# Altium PCB driver_V1.1.PcbDoc
Units mm, origin at the board's own origin, x right, y up, seen from the top; angles counter-clockwise.
Board outline 63.2 x 30.2 mm, 2 copper layers (Top Layer, Bottom Layer), stack 1.58 mm thick; 35 components, 21 nets, 95 pads, 17 vias.
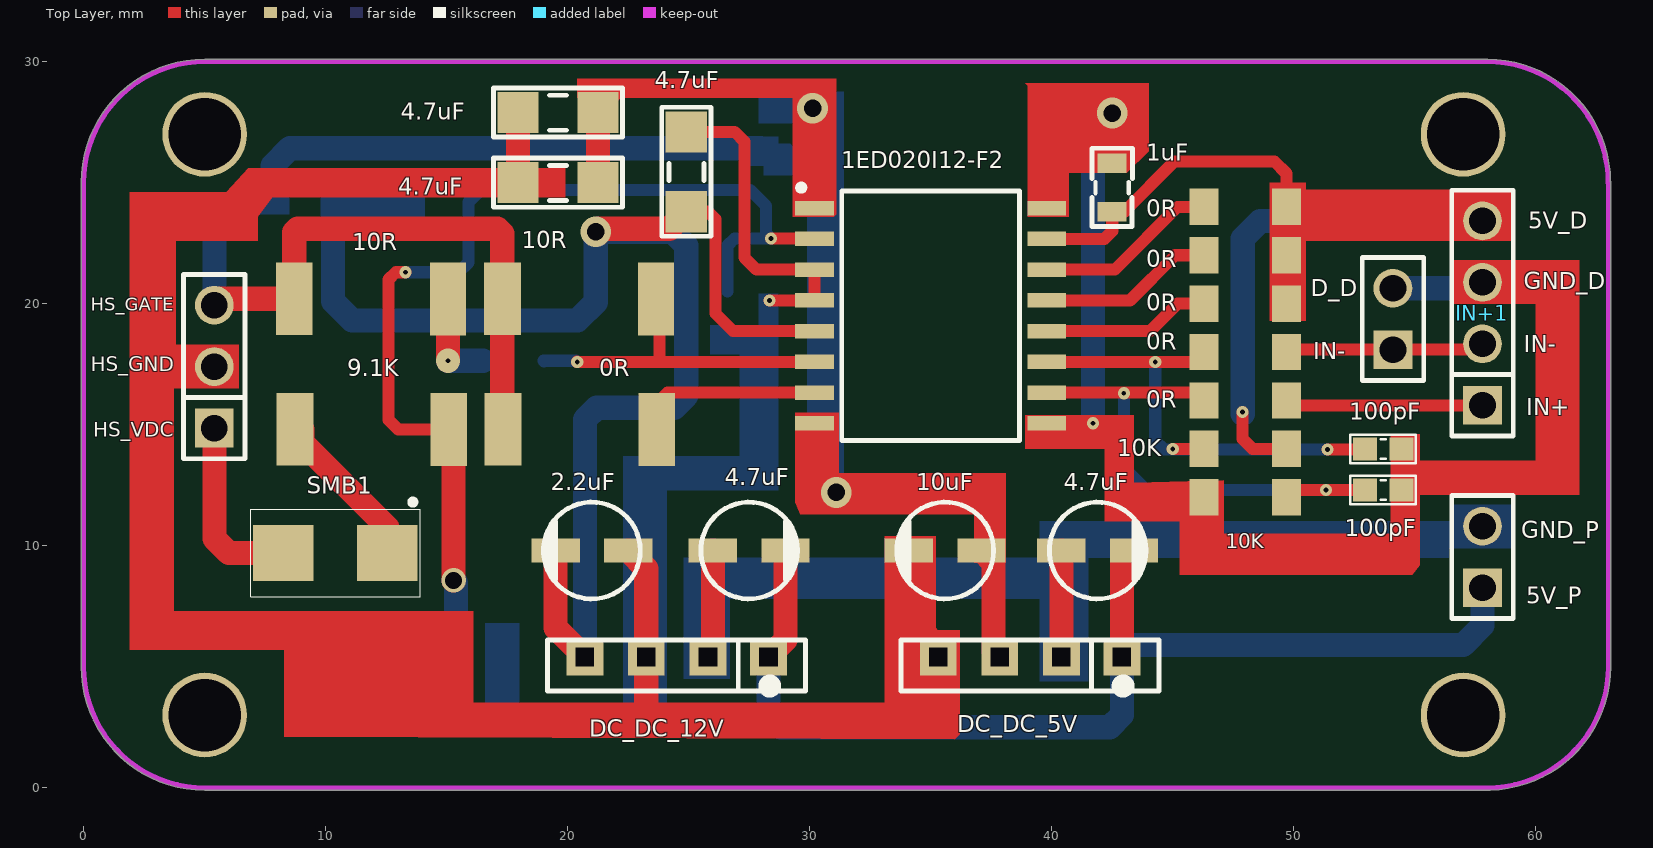
[diagram p0: Top Layer view]
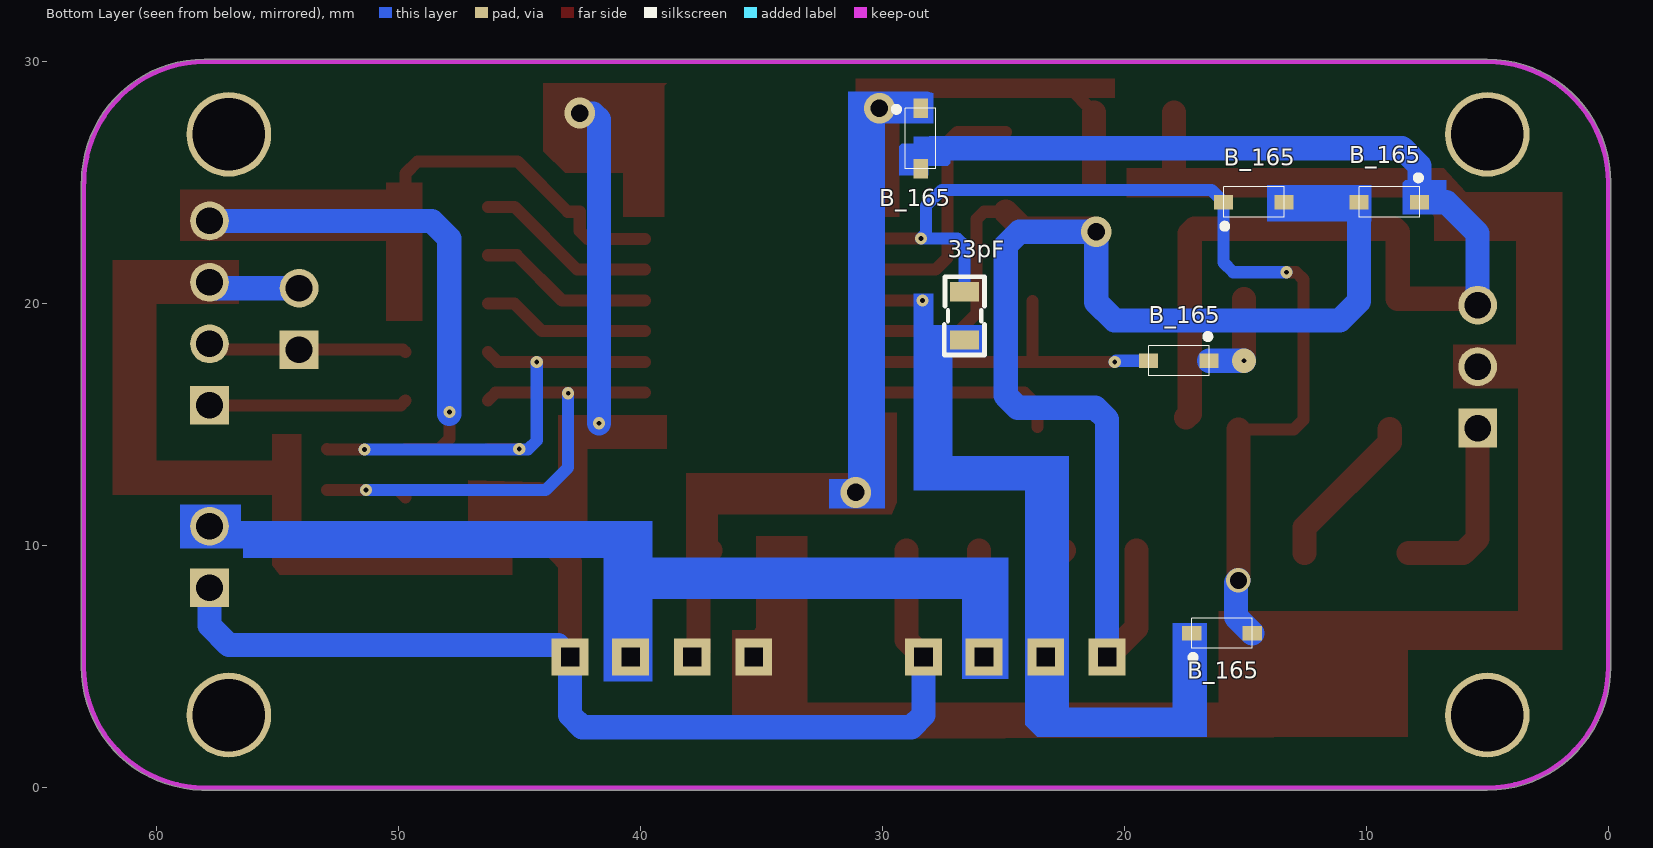
[diagram p1: Bottom Layer view, seen from below]
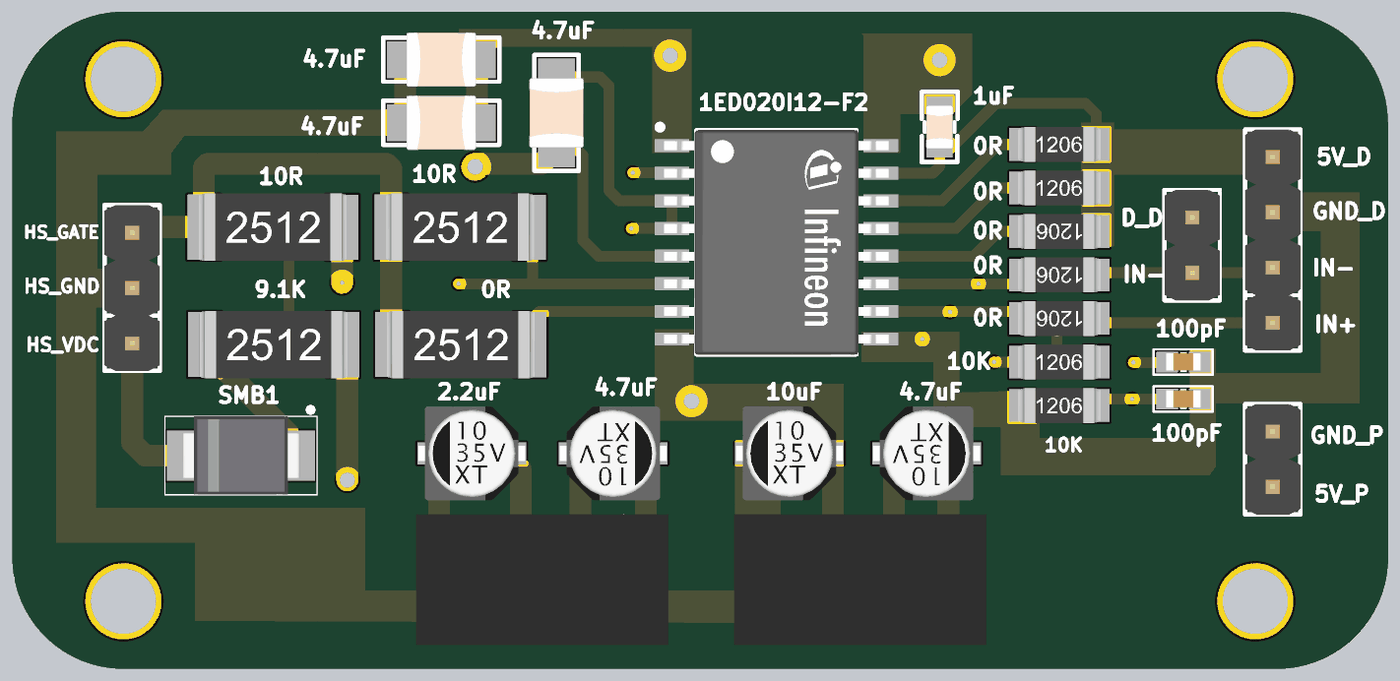
[diagram p2: 3D render of the assembled board from above, using the file's embedded part models]
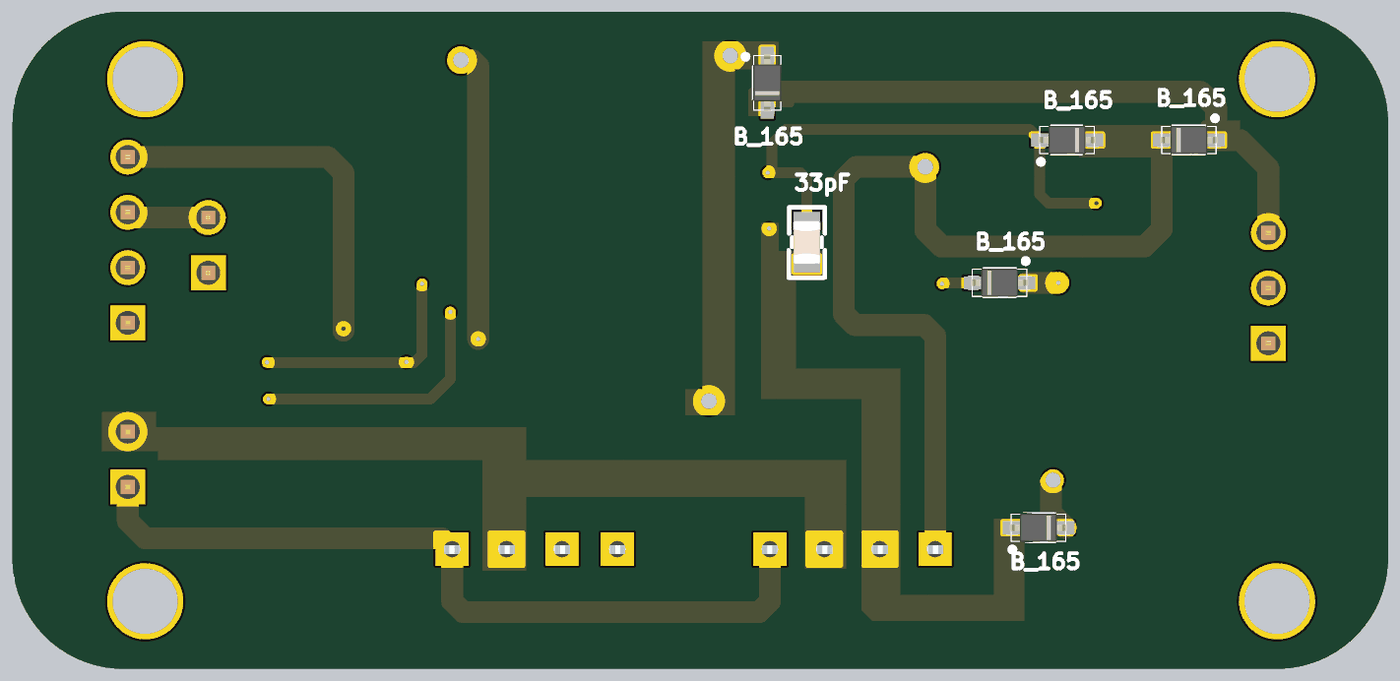
[diagram p3: 3D render of the assembled board from below, using the file's embedded part models]

## Layer stack, top to bottom
Top Solder: solder mask 0.01, Solder Resist, Dk 3.5
Top Layer: signal copper 0.035
Dielectric 1: dielectric 1.51, FR-4, Dk 4.8
Bottom Layer: signal copper 0.035
Bottom Solder: solder mask 0.01, Solder Resist, Dk 3.5

## Board outline
-0.1,5 -0.1,25 cw(c5,25) 5,30.1 cw(c5,30) 5.001,30.1 58,30.1 cw(c58,30) 58,30.1 cw(c57.988,25) 63.088,25.048 cw(c63,25) 63.1,25 63.1,5 cw(c58,5) 58.116,-0.099 cw(c58.1,0) 58.1,-0.1 5,-0.1 cw(c5,5)

## Design rules (kind name [scope] priority, off if disabled: settings)
Clearance [All] p1: gap=0.5
PolygonConnect [All] p1: connectstyle=Relief reliefconductorwidth=0.254 reliefentries=4 polygonreliefangle="90 Angle" airgapwidth=0.254
RoutingVias [All] p1: holewidth=0.711 width=1.27 viastyle="Through Hole" minholewidth=0.711 minwidth=1.27 maxholewidth=0.711 maxwidth=1.27
SolderMaskExpansion [All] p1: expansion=0.102
Width [All] p1: maxlimit=2 minlimit=0.5 preferedwidth=1
30 further rules are at their usual default settings.

## Classes and differential pairs
component class driver_V1.1: 0 0R 13 15 16 17 22 29 30 32 33 B_165 IN+1

## Components (designator, comment, footprint, x,y, rotation, side; value= is the part's Value field where it differs from the comment)
0R "0R" RES1206 48,18 r180 top (schematic designator 22)
0R "0R" RES_2512 20.5,14.6 r0 top (schematic designator 21)
0R "0R" RES1206 48,16 r180 top (schematic designator 20)
0R "0R" RES1206 48,22 r0 top (schematic designator 17)
0R "0R" RES1206 48,20 r180 top (schematic designator 16)
0R "0R" RES1206 48,24 r0 top (schematic designator 15)
1ED020I12-F2 "1ED020I12-F2" SOIC127P1028X264-16N-1 35,19.5 r0 top (schematic designator 18)
1uF "1uF" "Tu 0805_N" 42.5,24.8 r270 top (schematic designator 7)
2.2uF "2.2uF_35V" tu_4x5.4mm 21,9.8 r0 top (schematic designator 3)
4.7uF "4.7uF" "tu 1206_N" 19.6,25 r180 top (schematic designator 33)
4.7uF "4.7uF" "tu 1206_N" 19.6,27.9 r180 top (schematic designator 32)
4.7uF "4.7uF" "tu 1206_N" 24.9,25.45 r270 top (schematic designator 9)
4.7uF "4.7uF_35V" tu_4x5.4mm 27.5,9.8 r180 top (schematic designator 6)
4.7uF "4.7uF_35V" tu_4x5.4mm 41.9,9.8 r180 top (schematic designator 2)
9.1K "9.1K" RES_2512 11.9,14.6 r0 top (schematic designator 19)
10K "10K" RES1206 48,12 r0 top (schematic designator 30)
10K "10K" RES1206 48,14 r0 top (schematic designator 13)
10R "10R" RES_2512 20.466,19.992 r0 top (schematic designator 24)
10R "10R" RES_2512 11.866,19.992 r0 top (schematic designator 23)
10uF "10uF_35V" tu_4x5.4mm 35.6,9.8 r0 top (schematic designator 5)
33pF "33pF" "Tu 0805_N" 26.603,19.5 r90 bottom (schematic designator 25)
34 "JP 1x2 2.54" "JP 1x2 DT_n" 54.1,18.1 r90 top
100pF "100pF" "Tu 0603" 53.7,12.3 r180 top (schematic designator 29)
100pF "100pF" "Tu 0603" 53.7,14 r180 top (schematic designator 26)
B_165 "BAT165" BAT165E6327HTSA1TRND 15.96,6.38 r90 bottom (schematic designator B5)
B_165 "BAT165" BAT165E6327HTSA1TRND 28.42,26.83 r180 bottom (schematic designator B4)
B_165 "BAT165" BAT165E6327HTSA1TRND 17.75,17.64 r270 bottom (schematic designator B3)
B_165 "BAT165" BAT165E6327HTSA1TRND 9.05,24.2 r270 bottom (schematic designator B2)
B_165 "BAT165" BAT165E6327HTSA1TRND 14.65,24.2 r90 bottom (schematic designator B1)
DC_DC_5V "DC_DC_12V" B0512S/D-1W 39.05,5.1 r0 top (schematic designator 4)
DC_DC_12V "DC_DC_12V" B0512S/D-1W 24.45,5.1 r0 top (schematic designator 1)
IN+1 "JP 1x4 2.54" "JP 1X4 DT_N" 57.8,15.8 r90 top
JP1 "JP 1x2 2.54" "JP 1x2 DT_n" 57.8,8.26 r90 top
JP? "JP 1x3 2.54" "JP 1x3 DT" 5.4,14.86 r90 top
SMB1 "S3N" SMB 10.4,9.7 r180 top

## Footprints (in the part's own frame and the unit in brackets; to place one, negate y for a bottom-side part, rotate by r counter-clockwise, add the part's x,y. Pads: shape width x height; smd on the part's side, far side on the other; paste and mask are expansions set on the pad)
B0512S/D-1W [mm] "B0512S/D-1W"
  rect 1.52x1.52 hole 0.75 square: 1(3.85,0.3) 2(1.35,0.3) 3(-1.2,0.3) 4(-3.74,0.3)
  silkscreen extent -5.28,-1.12 5.38,1, body extent -6,-4.1 5.6,1.91, height 18
BAT165E6327HTSA1TRND [mm] "BAT165E6327HTSA1TRND"
  rect 0.6x0.8 smd: 1(0,1.25) 2(0,-1.25)
  silkscreen extent -1.1,-1.25 0.63,1.3, body extent -0.71,-1.52 0.71,1.52, height 1.14
"JP 1x2 DT_n" [mm] "2 pins, 1 row, straight, gold plating"
  rect 1.6x1.6 hole 1.1: 1(0,0)
  round 1.6 hole 1.1: 2(2.54,0)
  silkscreen extent -1.27,-1.27 3.81,1.27, body extent -1.27,-1.27 3.81,1.27, height 8.54
"JP 1x3 DT" [mm]
  rect 1.6x1.6 hole 1.1: 1(0,0)
  round 1.6 hole 1.1: 2(2.54,0) 3(5.08,0)
  silkscreen extent -1.27,-1.27 6.35,1.27, body extent -1.27,-1.27 6.35,1.27, height 8.54
"JP 1X4 DT_N" [mm] "4 pins, 1 row, straight, gold plating"
  rect 1.6x1.6 hole 1.1: 1(0,0)
  round 1.6 hole 1.1: 2(2.54,0) 3(5.08,0) 4(7.62,0)
  silkscreen extent -1.27,-1.27 8.89,1.27, body extent -1.27,-1.27 8.89,1.27, height 8.54
RES1206 [mm]
  rect 1.2x1.5 smd: 1(-1.7,0) 2(1.7,0)
  body extent -1.9,-0.8 1.9,0.8, height 0.6
RES_2512 [mm]
  rect 1.5x3 smd: 1(3.185,0.2)
  rect 1.524x3 smd: 2(-3.166,0.208)
  body extent -3.4,-1.35 3.4,1.75, height 0.6
SMB [mm] "DO-214"
  rect 2.5x2.3 smd: 1(-2.15,0) 2(2.15,0)
  silkscreen extent -3.5,-2.2 3.5,1.8, body extent -2.7,-1.8 2.7,1.8
SOIC127P1028X264-16N-1 [mm] "SOIC,1.27mm,pitch;16 pin,7.52mm W X 10.34mm L X 2.64mm H body"
  rect 1.6x0.6 smd paste+0 mask+0: 1(-4.8,4.445) 2(-4.8,3.175) 3(-4.8,1.905) 4(-4.8,0.635) 5(-4.8,-0.635) 6(-4.8,-1.905) 7(-4.8,-3.175) 8(-4.8,-4.445) 9(4.8,-4.445) 10(4.8,-3.175) 11(4.8,-1.905) 12(4.8,-0.635) 13(4.8,0.635) 14(4.8,1.905) 15(4.8,3.175) 16(4.8,4.445)
  silkscreen extent -5.47,-5.15 3.68,5.42, body extent -5.16,-5.17 5.16,5.17, height 2.65
"Tu 0603" [mm] "Chip Capacitor, 2-Leads, Body 1,60x0,80mm, IPC Medium Density"
  rect 1x0.95 smd mask+0.076: 1(-0.75,0) 2(0.75,0)
  silkscreen extent -1.35,-0.58 1.37,0.58, body extent -0.8,-0.4 0.8,0.4, height 0.9
"Tu 0805_N" [mm] "Compoment SMD 80x50mil"
  rect 0.8x1.2 smd: 1(-1,-0.003) 2(1,0)
  silkscreen extent -1.62,-0.83 1.61,0.83, body extent -1,-0.62 1,0.63, height 1.26
"tu 1206_N" [mm]
  rect 1.7x1.7 smd: 1(-1.65,0) 2(1.65,0)
  silkscreen extent -2.67,-1.02 2.67,1.02, body extent -1.6,-1.25 1.6,1.25, height 2.01
tu_4x5.4mm [mm]
  rect 2x1 smd: 1(-1.5,0) 2(1.5,0)
  silkscreen extent -2,-2 2,2, body extent -2.45,-2.15 2.45,2.15, height 5.4

## Part data
0R 0R 0R 0R 0R 0R 9.1K 10K 10K 10R 10R: library part 311-0.0GRTR-ND
1ED020I12-F2: "Single IGBT Driver IC"
1uF 33pF: library part cap_0805
2.2uF 4.7uF 4.7uF 10uF: library part capacitor_electric, "capacitor_electric"
4.7uF 4.7uF 4.7uF: library part cap_1210
34 JP1: library part "JP 1x2 2.54 Duc Thang", "C?m"
100pF 100pF: library part cap_0603
DC_DC_5V DC_DC_12V: library part DC_DC_12v
IN+1: library part "JP 1x4 2.54 Duc Thang", "C?m"
JP?: library part "JP 1x3 2.54 Duc Cong", "C?m"
SMB1: library part S3A-S3N

## Free pads (board coordinates)
  round 3.5 hole 3: 0(5,3) 0(5,27) 0(57,3) 0(57,27)

## Via types
v1: diameter 0.5, hole 0.2, Top Layer to Bottom Layer, 11 vias
v2: diameter 1.27, hole 0.72, Top Layer to Bottom Layer, 4 vias
v3: diameter 1, hole 0.2, Top Layer to Bottom Layer, 1 vias
v4: diameter 1, hole 0.7, Top Layer to Bottom Layer, 1 vias

## Nets (pads, with @x,y where several pads share a name; then routed paths per layer and width w, separated by ;. In a path a pad name is that pad's centre, name@x,y a point inside that pad or via, vN(x,y) a via of type N, cw(c..) or ccw(c..) an arc to the next point about the centre after c; other vN are vias at no path point)
5V: 0R.1@49.7,20 0R.2@49.7,22 0R.2@49.7,24 1ED020I12-F2.15 1uF.2 10K.2@49.7,14 IN+1.4 | length 46.2
  Top Layer w0.5: 1ED020I12-F2.15 42.175,22.675 42.5,23 1uF.2 42.996,23.8 45.077,25.88 49.2,25.88 49.7,25.38 0R.2@49.7,24 ; v1(47.89,15.53) 47.89,14.41 48.3,14 10K.2@49.7,14 ; 0R.1@49.7,20 49.7,22 0R.2@49.7,24 ; IN+1.4 57.22,24 0R.2@49.7,24
  Bottom Layer w1: v1@47.89,15.44 v1(47.89,15.53) 47.89,22.69 48.62,23.42 IN+1.4
12V: 1ED020I12-F2.5 2.2uF.1 4.7uF.2@24.9,23.8 B_165.2@10.3,24.2 B_165.2@13.4,24.2 DC_DC_12V.4 | length 61.8
  Top Layer w0.5: v2@21.13,22.95 v2@21.28,23.1 ; 4.7uF.2@24.9,23.8 25.8,23.8 26.1,23.5 26.1,19.6 26.835,18.865 1ED020I12-F2.5
  Top Layer w1: 2.2uF.1 19.5,6.61 DC_DC_12V.4 ; v2@21.28,23.1 24.2,23.1 4.7uF.2@24.9,23.8
  Bottom Layer w1: B_165.2@10.3,24.2 10.3,20.1 11.1,19.3 20.4,19.3 21.16,20.06 v2(21.16,22.97) 24.33,22.97 24.9,22.4 24.9,16.2 24.4,15.7 21.2,15.7 20.71,15.21 DC_DC_12V.4
-5V: 1ED020I12-F2.1 1ED020I12-F2.8 4.7uF.1@21.25,25 4.7uF.1@21.25,27.9 10uF.2 B_165.1@28.42,28.08 DC_DC_5V.3 | length 51.1
  Top Layer w0.5: 4.7uF.1@21.25,27.9 22.35,29 29.6,29 30.12,28.48 v2(30.12,28.08) 30.12,24.025 1ED020I12-F2.1 ; 1ED020I12-F2.8 30.2,13 31.1,12.1 36.7,12.1 37.1,11.7 10uF.2 ; DC_DC_5V.3@37.6,5.65 DC_DC_5V.3
  Top Layer w1: 4.7uF.1@21.25,25 4.7uF.1@21.25,27.9 ; 10uF.2 37.6,9.3 DC_DC_5V.3@37.6,5.65
  Bottom Layer w1: B_165.1@28.42,28.08 v2(30.12,28.08) 30.6,27.6 30.6,12.7 v2(31.1,12.2)
GND_D: 1ED020I12-F2.9 1ED020I12-F2.16 1uF.1 10K.1@46.3,12 34.2 100pF.1 IN+1.3 | length 65.4
  Top Layer w0.5: 1ED020I12-F2.9 42.245,15.055 42.6,14.7 42.6,12.2 42.8,12 46.3,12 46.6,11.7 46.6,9.7 47.2,9.1 53.86,9.1 54.45,9.69 100pF.1@54.45,12.3 ; 1ED020I12-F2.16 39.8,25.38 40.22,25.8 1uF.1 v2(42.497,27.877) ; 100pF.1@54.45,14 100pF.1@54.45,12.3 ; IN+1.3@57.56,20.64 IN+1.3 60.26,20.88 60.99,20.15 60.99,13.7 60.07,12.78 54.93,12.78 100pF.1@54.45,12.3
  Bottom Layer w1: v1(41.7,15.06) 41.7,27.61 41.95,27.86 v2@42.6,27.86 ; 34.2 57.56,20.64 IN+1.3
GND_P: 4.7uF.2@26,9.8 4.7uF.2@40.4,9.8 DC_DC_5V.2 DC_DC_12V.2 JP1.2 | length 48.5
  Top Layer w0.5: DC_DC_12V.2 DC_DC_12V.2@26,5.6
  Top Layer w1: DC_DC_12V.2@26,5.6 4.7uF.2@26,9.8 ; DC_DC_5V.2 4.7uF.2@40.4,9.8
  Bottom Layer w0.5: DC_DC_12V.2 25.8,7.8 26.6,8.6 40.4,8.6 ; DC_DC_5V.2 40.4,8.6 ; JP1.2 57.5,10.5 41,10.5 40.4,9.9 40.4,8.6
HS_GATE: 0R.2@17.334,14.808 10R.2 B_165.1@7.8,24.2 B_165.2@28.42,25.58 JP?.3 | length 50.4
  Top Layer w1: JP?.3 5.66,20.2 8.7,20.2 8.7,22.95 8.85,23.1 17.1,23.1 17.3,22.9 17.3,20.2 17.3,15.442 0R.2@17.449,15.293
  Bottom Layer w1: JP?.3 5.4,22.9 6.7,24.2 7.8,24.2 7.8,25.7 8.52,26.42 27.98,26.42
HS_GND: 1ED020I12-F2.3 1ED020I12-F2.4 2.2uF.2 4.7uF.1@24.9,27.1 4.7uF.2@17.95,25 4.7uF.2@17.95,27.9 10uF.1 33pF.1 B_165.1@17.21,6.38 DC_DC_5V.4 DC_DC_12V.3 JP?.2 | length 134.1
  Top Layer w0.5: 4.7uF.1@24.9,27.1 26.9,27.1 27.3,26.7 27.3,21.905 27.8,21.405 1ED020I12-F2.3 1ED020I12-F2.4 v1(28.335,20.135)
  Top Layer w1: 3.56,17.4 JP?.2 ; 4.7uF.2@17.95,27.9 4.7uF.2@17.95,25 ; 4.7uF.2@18.05,25 4.7uF.2@17.95,25 ; 2.2uF.2 23.25,9.05 DC_DC_12V.3 23.25,2.7 ; 10uF.1 34.4,9.5 34.4,6.31 DC_DC_5V.4 35.31,3.51 34.5,2.7 23.25,2.7 ; 4.7uF.2@17.95,25 7,25 6.6,24.6 6.6,23.9 6.3,23.6 4.1,23.6 3.23,22.73 3.23,6.93 3.46,6.7 8.7,6.7 9.3,6.1 9.3,3.4 10,2.7 23.25,2.7
  Bottom Layer w0.5: B_165.1@17.21,6.38 17.21,3.68 18.12,2.77 22.44,2.77 23.25,3.58 DC_DC_12V.3 23.25,12.55 23.8,13.1 27.9,13.1 28.335,13.535 v1(28.335,20.135) ; 33pF.1 28.3,18.5 v1@28.3,20.1
HS_HV_VDC: JP?.1 SMB1.2 | length 7.7
  Top Layer w1: JP?.1 5.4,10.3 6,9.7 SMB1.2
Net13_1: 0R.2@46.3,18 1ED020I12-F2.11 10K.1@46.3,14 100pF.2@52.95,14 | length 20.1
  Top Layer w0.5: 1ED020I12-F2.11 v1(44.28,17.595) 45.895,17.595 0R.2@46.3,18 ; v1(45,14) 10K.1@46.3,14 ; v1(51.4,13.98) 52.93,13.98 100pF.2@52.95,14
  Bottom Layer w0.5: v1(44.28,17.595) 44.28,14.34 44.64,13.98 v1(51.4,13.98)
Net15_1: 0R.1@46.3,24 1ED020I12-F2.14 | length 7.6
  Top Layer w0.5: 1ED020I12-F2.14 42.605,21.405 45.2,24 0R.1@46.3,24
Net16_2: 0R.2@46.3,20 1ED020I12-F2.12 | length 7
  Top Layer w0.5: 1ED020I12-F2.12 44.065,18.865 45.2,20 0R.2@46.3,20
Net17_1: 0R.1@46.3,22 1ED020I12-F2.13 | length 7.3
  Top Layer w0.5: 1ED020I12-F2.13 43.235,20.135 45.1,22 0R.1@46.3,22
Net18_2: 1ED020I12-F2.2 9.1K.1 33pF.2 B_165.1@15.9,24.2 B_165.2@14.71,6.38 | length 43.1
  Top Layer w0.5: v1(13.3,21.3) 12.9,21.3 12.6,21 12.6,15.2 13,14.8 9.1K.1 ; v1(28.4,22.7) 30.175,22.7 1ED020I12-F2.2
  Top Layer w1: v4@15.285,8.565 9.1K.1@15.285,14.8
  Bottom Layer w0.5: v1(13.3,21.3) 15.5,21.3 15.9,21.7 15.9,24.2 16.4,24.7 27.539,24.7 28.2,24.039 28.2,22.9 v1(28.4,22.7) 26.9,22.7 26.603,22.403 33pF.2
  Bottom Layer w1: B_165.2@14.71,6.38 15.39,7.06 15.39,8.47 v4(15.29,8.57)
Net18_6: 1ED020I12-F2.6 10R.1@23.651,20.192 B_165.2@19,17.64 | length 13.8
  Top Layer w0.5: v1@20.39,17.6 v1(20.395,17.595) 23.8,17.595 ; 10R.1@23.8,20.115 23.8,17.595 ; 1ED020I12-F2.6 23.8,17.595
  Bottom Layer w0.5: B_165.2@19.02,17.62 19,17.64 20.35,17.64 v1(20.395,17.595)
Net18_7: 0R.1@23.685,14.8 1ED020I12-F2.7 | length 7.7
  Top Layer w0.5: 0R.1@23.585,14.9 23.585,15.785 24.125,16.325 1ED020I12-F2.7
Net18_10: 0R.2@46.3,16 1ED020I12-F2.10 10K.2@49.7,12 100pF.2@52.95,12.3 | length 21.8
  Top Layer w0.5: 1ED020I12-F2.10 45.975,16.325 0R.2@46.3,16 ; 10K.2@49.7,12 50,12.3 v1(51.34,12.3) 100pF.2@52.95,12.3
  Bottom Layer w0.5: v1(42.98,16.3) 42.98,13.23 43.91,12.3 v1(51.34,12.3)
Net19_2: 9.1K.2 SMB1.1 | length 6.6
  Top Layer w1: 9.1K.2@9.034,14.808 9.034,14.266 12.55,10.75 SMB1.1
Net20_1: 0R.1@49.7,16 IN+1.1 | length 8.2
  Top Layer w0.5: 0R.1@49.7,16 49.9,15.8 IN+1.1
Net22_1: 0R.1@49.7,18 34.1 IN+1.2 | length 8.6
  Top Layer w0.5: 0R.1@49.7,18 49.8,18.1 34.1 57.56,18.1 IN+1.2
  Bottom Layer w0.5: 34.1 34.1@54.34,18.34
Net23_1: 10R.1@15.051,20.192 B_165.1@16.5,17.64 | length 4
  Top Layer w0.5: v3@15.04,17.67 v3@15.051,17.681
  Top Layer w1: v3@15.051,17.681 10R.1@15.051,20.192
  Bottom Layer w1: v3(15.05,17.64) B_165.1@16.5,17.64
VCC_5V: 4.7uF.1@29,9.8 4.7uF.1@43.4,9.8 DC_DC_5V.1 DC_DC_12V.1 JP1.1 | length 46.1
  Top Layer w1: DC_DC_12V.1 29,6.1 4.7uF.1@29,9.8 ; DC_DC_5V.1 42.9,9.3 4.7uF.1@43.4,9.8
  Bottom Layer w1: DC_DC_12V.1 28.3,3 28.8,2.5 42.4,2.5 42.9,3 DC_DC_5V.1 43.4,5.9 57,5.9 57.8,6.7 JP1.1

## Keep-outs
Keep-Out Layer:
  lines w0.2: 58,0 ccw(c58,5) 63,5 63,25 ; 58.1,0 5,0 cw(c5,5) 0,5 0,25 cw(c5,25) 5,30 58,30 cw(c57.988,25) 62.988,24.978

## Other copper
Top Layer:
  region net -5V: 29.4,11.8 29.6,11.3 36.8,11.3 36.8,9.3 38.1,9.3 38.1,13 31.2,13 31.2,15.5 29.4,15.5
  region net -5V: 31,23.6 31.1,23.7 31.1,24.5 31.1,29.3 20.4,29.3 20.4,28.5 29.3,28.5 29.3,24.5 29.3,23.6
  region net HS_GND: 1.9,18 1.9,24.6 2,24.6 5.9,24.6 6.8,25.6 7.6,25.6 19.9,25.6 19.9,24.4 7.8,24.4 7.2,23.6 7.2,22.6 3.8,22.6 3.8,18
  region net HS_GND: 6.4,18.3 6.4,16.5 3.711,16.5 3.711,7.3 9.7,7.3 10.3,7.3 10.3,7.19 10.265,7.19 10.265,6.479 10.3,5.7 1.9,5.7 1.9,18.3
  region net HS_GND: 33.1,10.4 35.2,10.4 35.2,6.6 35.3,6.5 36.2,6.5 36.2,2.2 36,2 8.287,2.1 8.287,6.72 8.287,7.3 16.1,7.3 16.1,3.5 24.9,3.5 33.1,3.5
  region net 5V: 50.5,22.6 59,22.6 59,24.7 58.8,24.7 54.5,24.7 50.5,24.7
  region net 5V: 49,25 49,19.3 50.5,19.3 50.5,25
  region net GND_D: 40.7,23.6 39,23.6 39,28.8 39,29 38.9,29.1 44,29.1 44,26.3 43.1,25.4 40.7,25.4
  region net GND_D: 55,13.5 60,13.5 60,13.7 60,20 56.6,20 56.6,21.8 61.8,21.8 61.8,20.3 61.8,12.1 54.9,12.1 54.9,13.5
  region net GND_D: 45.3,10.9 45.3,8.8 54.9,8.8 55.2,9.2 55.2,10.5 55.2,11.9 55.2,14.6 54,14.6 54,10.5 50.3,10.5 47.1,10.5 47.1,10.9
  region net GND_D: 38.9,15.4 38.9,14.7 38.9,14 42.2,14 42.2,11 45.288,11 45.3,10.9 47.1,10.9 47.1,11 47.1,12.7 43.4,12.6 43.4,15.4 42.7,15.4 41.9,15.4
Bottom Layer:
  region net -5V: 27.9,28.55 27.9,28.7 28.1,28.75 31.4,28.75 31.4,12.75 32.2,12.75 32.2,11.55 31.4,11.55 29.9,11.55 29.9,27.45 27.9,27.45
  region net 12V: 9.8,24.9 14.1,24.9 14.1,23.4 9.8,23.4
  region net HS_GATE: 6.7,25.1 8.4,25.1 8.5,25 8.5,23.7 6.8,23.7 6.7,23.8
  region net HS_GATE: 27.3,25.7 27.2,25.8 27.2,26.9 28.7,26.9 28.7,25.7
  region net HS_GATE: 28.1,25.3 28.1,26.6 29.2,26.6 29.3,26.5 29.3,25.3
  region net HS_GND: 24.1,6.3 22.3,6.3 22.3,13.5 22.3,13.7 27.1,13.7 27.1,17.9 25.9,17.9 25.9,19.1 27.9,19.1 27.9,19.7 27.9,20.4 28.7,20.4 28.7,12.3 24.1,12.3
  region net 12V: 10.45,24.7 13.15,24.7 13.15,23.4 10.45,23.4
  region net HS_GND: 16.6,6.8 18,6.8 18,5 18,3.3 22.3,3.3 22.3,6.3 24.1,6.3 24.1,2.6 23.6,2.1 17.3,2.1 16.6,2.1 16.6,3.4 16.6,5
  region net GND_P: 24.8,4.5 26.7,4.5 26.7,7.8 40.1,7.8 40.1,9 40.1,9.5 24.8,9.5 24.8,6.5
  region net GND_P: 59,9.9 56.4,9.9 56.4,9.5 41.5,9.5 41.5,4.4 40.1,4.4 39.5,4.4 39.5,11 56.5,11 56.5,11.7 59,11.7

## Silkscreen, mask and mechanical layers (free items; w line width, h text height)
Top Overlay:
  text "5V_D" at 59.7,23.1 h0.7
  text "GND_D" at 59.5,20.6 h0.7
  text "D_D" at 50.7,20.3 h0.7
  text "HS_GATE" at 0.3,19.7 h0.55
  text "IN-" at 59.5,18 h0.7
  text "IN-" at 50.8,17.7 h0.7
  text "HS_GND" at 0.3,17.2 h0.6
  text "IN+" at 59.6,15.4 h0.7
  text "HS_VDC" at 0.4,14.5 h0.6
  text "GND_P" at 59.4,10.3 h0.7
  text "5V_P" at 59.6,7.6 h0.7